# Altium PCB PCB4.PcbDoc (part 3 of 3)
Units mm, origin at the board's own origin, x right, y up, seen from the top; angles counter-clockwise.
Board outline 185.25 x 140.25 mm, 2 copper layers (Top Layer, Bottom Layer); 401 components, 60 nets, 1114 pads, 228 vias.
Unrouted connection lines stored in the file: 2.
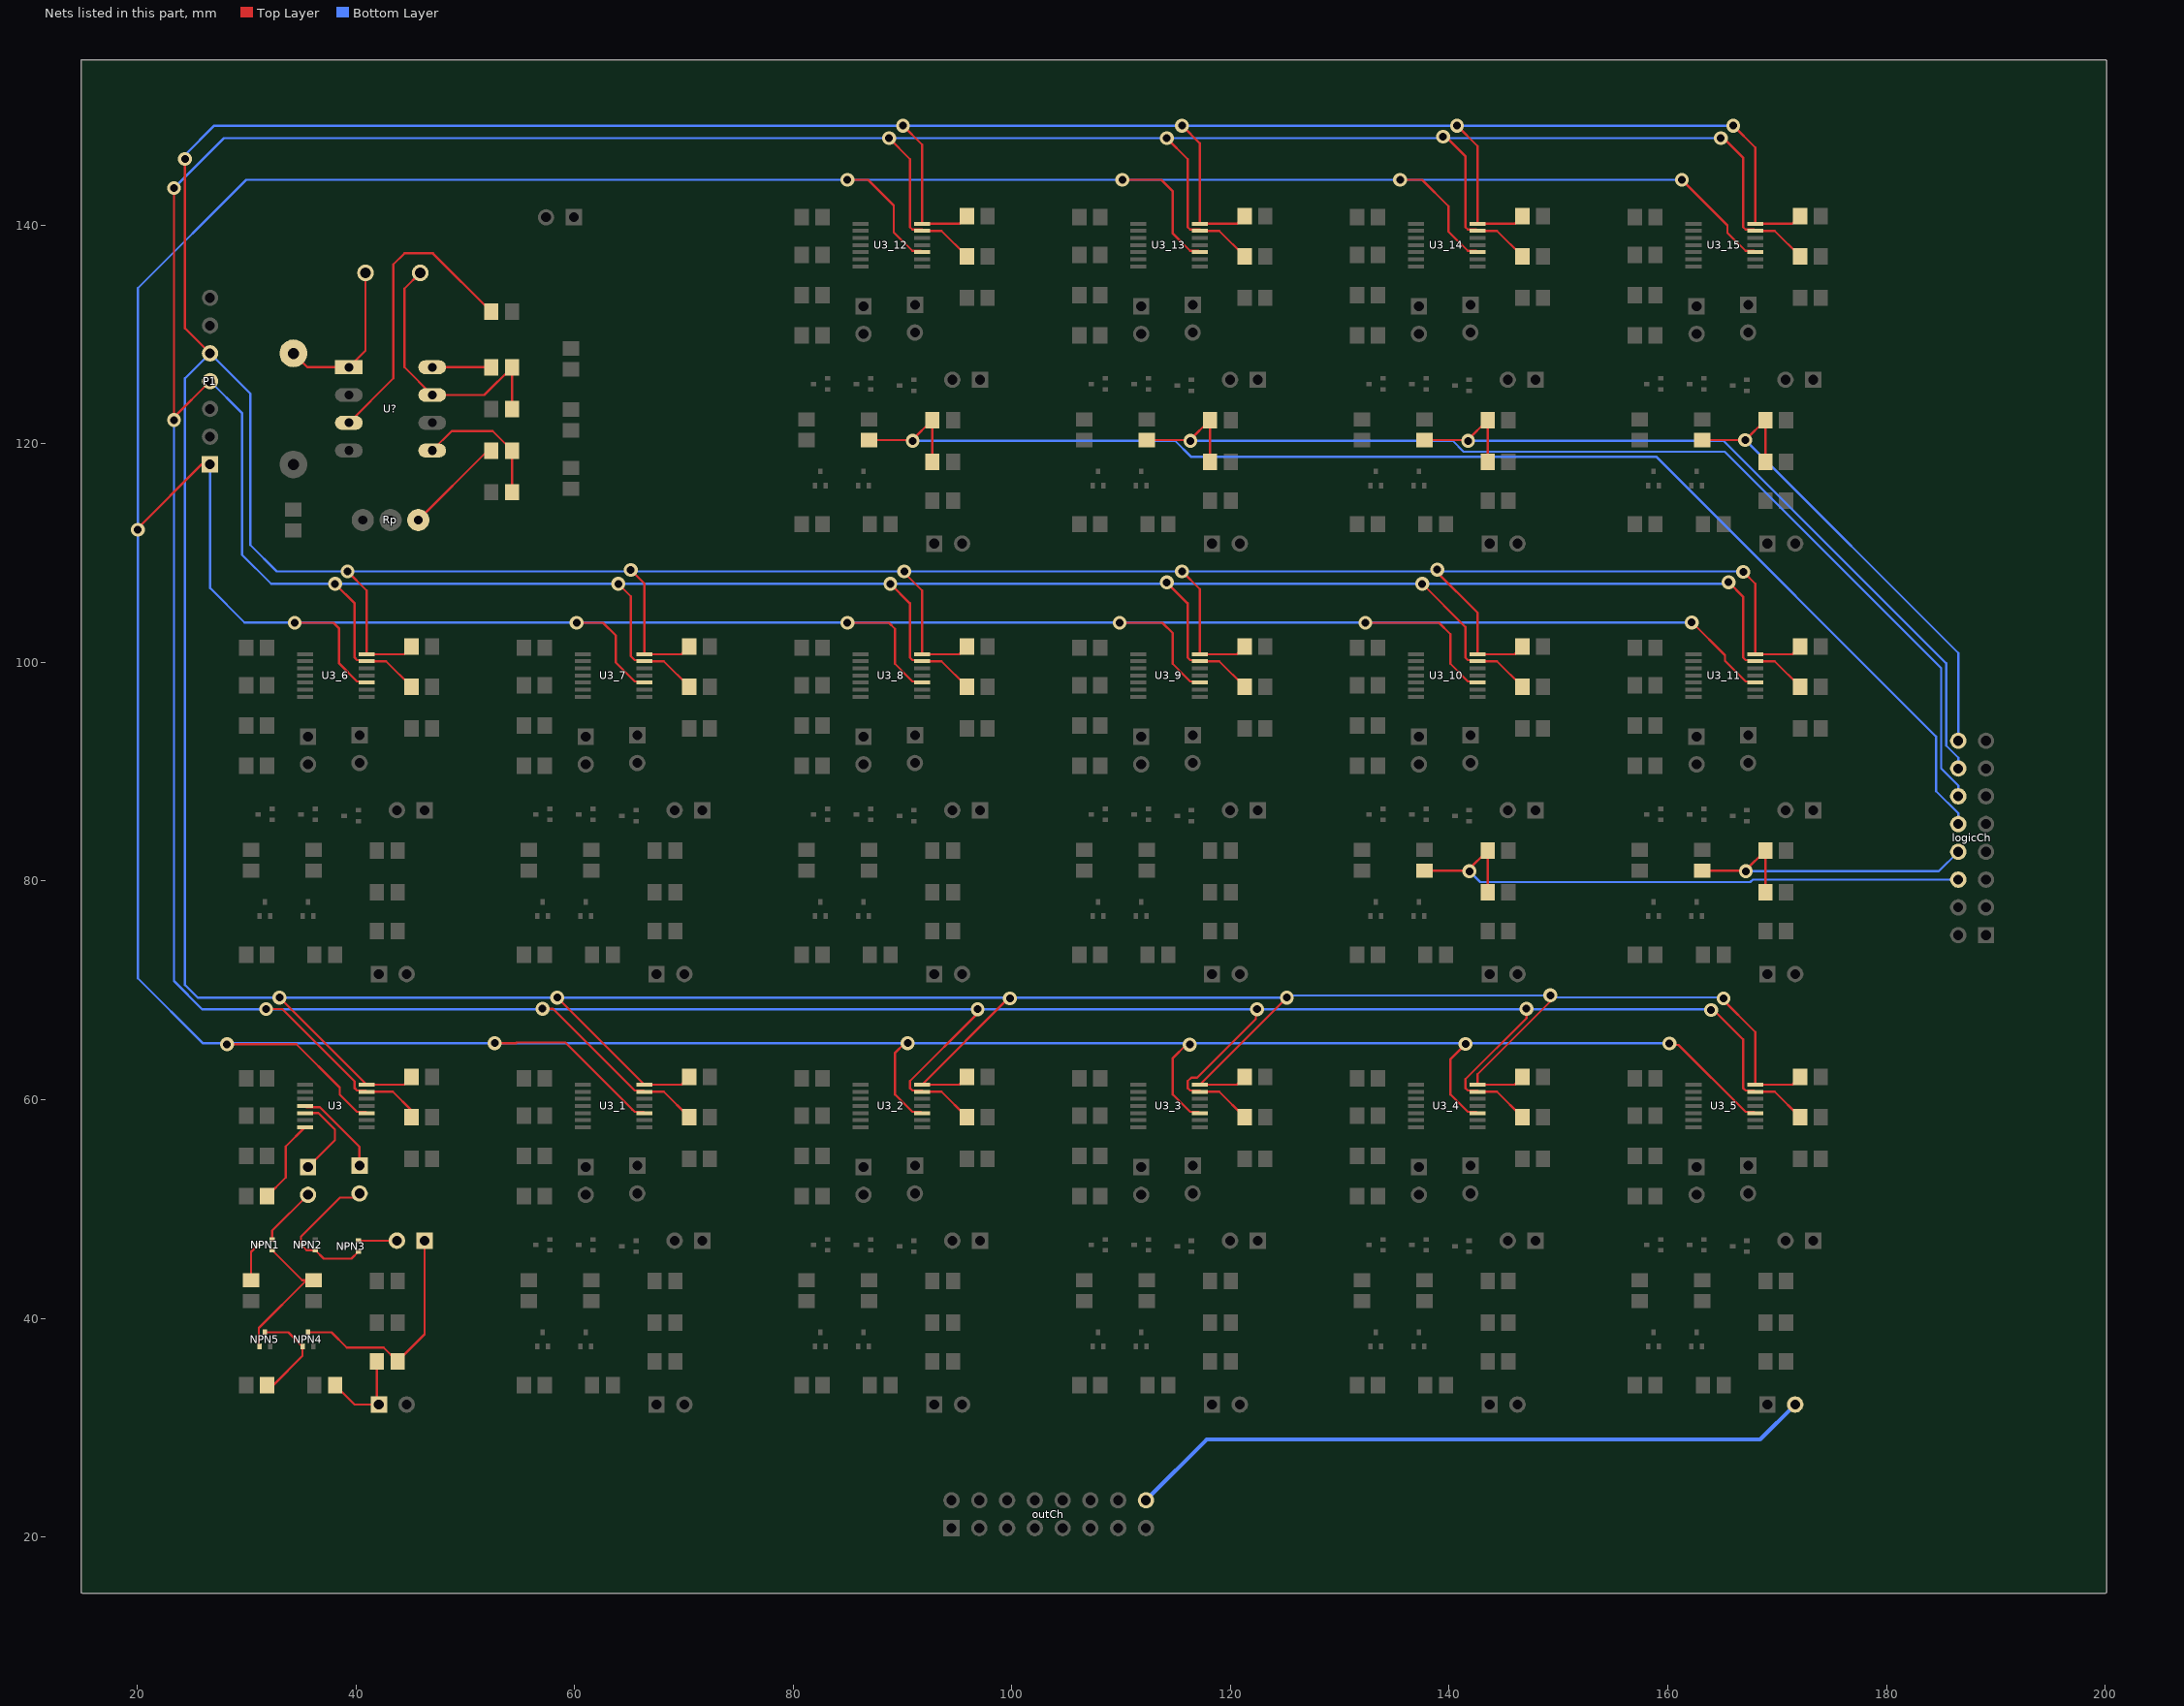
[diagram p3: the nets of this part, all layers, seen from the top]

## Via types
v1: diameter 1.27, hole 0.711, Top Layer to Bottom Layer, 228 vias

## Nets (pads, with @x,y where several pads share a name; then routed paths per layer and width w, separated by ;. In a path a pad name is that pad's centre, name@x,y a point inside that pad or via, vN(x,y) a via of type N, cw(c..) or ccw(c..) an arc to the next point about the centre after c; other vN are vias at no path point) (continued)
LOGICCH11: C1_10.1 C2_10.1 logicCh.11 R1_10.2 | length 55.6
  Top Layer w0.203: R1_10.2@137.739,80.962 141.681,80.962 C2_10.1@143.52,82.801 C1_10.1@143.52,78.991
  Bottom Layer w0.203: v1(141.859,80.899) 142.85,79.908 167.542,79.908 167.771,80.137 logicCh.11@186.563,80.137
LOGICCH12: C1_11.1 C2_11.1 logicCh.12 R1_11.2 | length 30.5
  Top Layer w0.203: R1_11.2@163.139,80.962 167.081,80.962 C2_11.1@168.92,82.801 C1_11.1@168.92,78.991
  Bottom Layer w0.203: v1(167.132,80.899) 184.785,80.899 logicCh.12@186.563,82.677
LOGICCH13: C1_12.1 C2_12.1 logicCh.13 R1_12.2 | length 124
  Top Layer w0.203: R1_12.2@86.939,120.332 90.881,120.332 C2_12.1@92.72,122.171 C1_12.1@92.72,118.361
  Bottom Layer w0.203: v1(90.932,120.269) 114.931,120.269 116.379,118.821 158.94,118.821 184.543,93.218 184.543,88.213 186.563,86.193 logicCh.13@186.563,85.217
LOGICCH14: C1_13.1 C2_13.1 logicCh.14 R1_13.2 | length 100
  Top Layer w0.203: R1_13.2@112.339,120.332 116.281,120.332 C2_13.1@118.12,122.171 C1_13.1@118.12,118.361
  Bottom Layer w0.203: v1(116.332,120.269) 140.331,120.269 141.322,119.278 165.202,119.278 185,99.48 185,90.296 186.563,88.733 logicCh.14@186.563,87.757
LOGICCH15: C1_14.1 C2_14.1 logicCh.15 R1_14.2 | length 72.6
  Top Layer w0.203: R1_14.2@137.739,120.332 141.681,120.332 C2_14.1@143.52,122.171 C1_14.1@143.52,118.361
  Bottom Layer w0.203: v1(141.732,120.269) 165.1,120.269 185.457,99.912 185.457,92.379 186.563,91.273 logicCh.15@186.563,90.297
LOGICCH16: C1_15.1 C2_15.1 logicCh.16 R1_15.2 | length 45.9
  Top Layer w0.203: R1_15.2@163.139,120.332 v1(167.081,120.332) C2_15.1@168.92,122.171 C1_15.1@168.92,118.361
  Bottom Layer w0.203: v1(167.081,120.332) 186.563,100.85 logicCh.16@186.563,92.837
MISO: P1.4 RD2.2 RD2_1.2 RD2_2.2 RD2_3.2 RD2_4.2 RD2_5.2 RD2_6.2 RD2_7.2 RD2_8.2 RD2_9.2 RD2_10.2 RD2_11.2 RD2_12.2 RD2_13.2 RD2_14.2 RD2_15.2 U3.13 U3_1.13 U3_2.13 U3_3.13 U3_4.13 U3_5.13 U3_6.13 U3_7.13 U3_8.13 U3_9.13 U3_10.13 U3_11.13 U3_12.13 U3_13.13 U3_14.13 U3_15.13 | length 759.6
  Top Layer w0.203: v1(23.368,122.174) v1@23.368,122.428 ; v1@23.368,143.002 v1@23.368,122.428 ; P1.4@26.67,125.73 v1@23.368,122.428 ; v1(31.801,68.301) 33.274,68.301 39.898,61.676 39.898,61.058 40.107,60.85 40.874,60.85 U3.13@40.99,60.733 43.381,60.733 45.095,59.02 RD2.2@45.095,58.417 ; v1(38.1,107.188) 39.898,105.39 39.898,100.428 40.107,100.22 40.99,100.22 U3_6.13@40.99,100.103 42.779,100.103 RD2_6.2@45.095,97.787 ; v1(57.074,68.326) 58.03,68.326 65.507,60.85 66.274,60.85 U3_1.13@66.39,60.733 68.179,60.733 RD2_1.2@70.495,58.417 ; v1(64.008,107.188) 65.151,106.045 65.151,100.575 65.507,100.22 66.274,100.22 U3_7.13@66.39,100.103 68.179,100.103 RD2_7.2@70.495,97.787 ; v1(88.773,147.955) 90.698,146.03 90.698,139.798 90.907,139.59 91.79,139.59 U3_12.13@91.79,139.473 93.579,139.473 RD2_12.2@95.895,137.157 ; v1(88.9,107.188) 90.678,105.41 90.678,100.448 90.907,100.22 91.674,100.22 U3_8.13@91.79,100.103 93.579,100.103 RD2_8.2@95.895,97.787 ; RD2_2.2@95.895,58.417 93.579,60.733 U3_2.13@91.79,60.733 91.79,60.85 90.907,60.85 90.698,61.058 90.698,61.708 96.876,67.886 v1(96.876,68.275) ; v1(114.173,107.315) 116.078,105.41 116.078,100.448 116.307,100.22 117.074,100.22 U3_9.13@117.19,100.103 118.979,100.103 RD2_9.2@121.295,97.787 ; v1(114.173,147.955) 116.098,146.03 116.098,139.798 116.307,139.59 117.19,139.59 U3_13.13@117.19,139.473 118.979,139.473 RD2_13.2@121.295,137.157 ; RD2_3.2@121.295,58.417 118.979,60.733 U3_3.13@117.19,60.733 117.19,60.85 116.307,60.85 116.098,61.058 116.098,61.708 116.42,62.03 116.948,62.03 122.309,67.39 122.309,68.156 v1(122.428,68.275) ; v1(137.541,107.188) 141.478,103.251 141.478,100.448 141.707,100.22 142.474,100.22 U3_10.13@142.59,100.103 144.379,100.103 RD2_10.2@146.695,97.787 ; v1@139.827,147.955 141.478,146.304 141.478,139.818 141.707,139.59 142.474,139.59 U3_14.13@142.59,139.473 144.379,139.473 RD2_14.2@146.695,137.157 ; RD2_4.2@146.695,58.417 144.379,60.733 U3_4.13@142.59,60.733 142.59,60.85 141.707,60.85 141.498,61.058 141.498,61.881 147.066,67.449 v1(147.066,68.326) ; v1(163.957,68.199) 164.084,68.326 166.878,65.532 166.878,61.078 167.107,60.85 167.874,60.85 U3_5.13@167.99,60.733 169.779,60.733 RD2_5.2@172.095,58.417 ; v1@165.227,147.828 166.878,146.177 166.878,139.818 167.107,139.59 167.874,139.59 U3_15.13@167.99,139.473 169.779,139.473 RD2_15.2@172.095,137.157 ; v1(165.557,107.34) 166.878,106.02 166.878,100.448 167.107,100.22 167.874,100.22 U3_11.13@167.99,100.103 169.779,100.103 RD2_11.2@172.095,97.787
  Bottom Layer w0.203: v1(23.368,122.174) 23.368,70.866 25.955,68.279 163.877,68.279 v1(163.957,68.199) ; v1(23.368,143.383) 27.94,147.955 v1(88.773,147.955) v1(114.173,147.955) v1(164.846,147.955) ; P1.4@26.67,125.73 29.591,122.809 29.591,109.855 32.258,107.188 v1(38.1,107.188) v1(64.008,107.188) v1(88.9,107.188) v1(137.541,107.188) 165.405,107.188 v1(165.557,107.34)
  other v1: 139.446,148.082
MOSI: P1.1 U3.10 U3_1.10 U3_2.10 U3_3.10 U3_4.10 U3_5.10 U3_6.10 U3_7.10 U3_8.10 U3_9.10 U3_10.10 U3_11.10 U3_12.10 U3_13.10 U3_14.10 U3_15.10 | length 685.7
  Top Layer w0.203: v1(20.066,112.141) 20.066,112.268 25.908,118.11 P1.1@26.67,118.11 ; v1(28.219,65.075) 34.558,65.075 38.527,61.106 38.527,60.48 40.107,58.9 40.874,58.9 U3.10@40.99,58.783 ; v1(34.417,103.632) 37.95,103.632 38.481,103.101 38.481,99.895 40.107,98.27 40.874,98.27 U3_6.10@40.99,98.153 ; v1(52.705,65.176) 54.639,65.176 54.703,65.24 59.17,65.24 65.298,59.111 65.298,59.108 65.507,58.9 66.274,58.9 U3_1.10@66.39,58.783 ; v1(60.198,103.632) 62.611,103.632 63.779,102.464 63.779,99.997 65.507,98.27 66.274,98.27 U3_7.10@66.39,98.153 ; v1(84.963,103.632) 88.75,103.632 89.306,103.075 89.306,99.87 90.907,98.27 91.674,98.27 U3_8.10@91.79,98.153 ; v1(84.963,144.145) 86.856,144.145 89.212,141.79 89.212,139.335 90.907,137.64 91.674,137.64 U3_12.10@91.79,137.523 ; v1(90.475,65.176) 90.195,65.176 89.327,64.308 89.327,60.48 90.907,58.9 91.674,58.9 U3_2.10@91.79,58.783 ; v1(109.855,103.632) 113.769,103.632 114.706,102.694 114.706,99.87 116.307,98.27 117.074,98.27 U3_9.10@117.19,98.153 ; v1(110.109,144.145) 113.665,144.145 114.727,143.083 114.727,139.22 116.307,137.64 117.074,137.64 U3_13.10@117.19,137.523 ; v1(116.281,65.049) 116.095,65.049 116.019,64.973 115.951,65.041 114.727,63.816 114.727,60.48 116.307,58.9 117.074,58.9 U3_3.10@117.19,58.783 ; v1(132.334,103.632) 139.065,103.632 140.106,102.591 140.106,99.87 141.707,98.27 142.474,98.27 U3_10.10@142.59,98.153 ; v1(135.509,144.145) 137.529,144.145 139.948,141.726 139.948,139.398 141.707,137.64 142.474,137.64 U3_14.10@142.59,137.523 ; v1(141.503,65.1) 140.127,63.723 140.127,60.48 141.707,58.9 142.474,58.9 U3_4.10@142.59,58.783 ; v1@160.274,65.024 160.982,65.024 167.107,58.9 167.874,58.9 U3_5.10@167.99,58.783 ; v1(161.29,144.145) 165.456,139.979 165.456,139.291 167.107,137.64 167.874,137.64 U3_15.10@167.99,137.523 ; v1(162.179,103.657) 162.23,103.657 165.233,100.654 165.233,100.143 167.107,98.27 167.874,98.27 U3_11.10@167.99,98.153
  Bottom Layer w0.203: P1.1@26.67,118.11 26.67,106.807 29.82,103.657 v1(162.179,103.657) ; v1(160.147,65.151) 160.122,65.176 v1(90.475,65.176) 26.06,65.176 26.035,65.151 20.066,71.12 v1(20.066,112.141) 20.066,134.239 29.972,144.145 v1(84.963,144.145) v1(110.109,144.145) v1(135.509,144.145) v1(161.29,144.145)
NetC3_1: C3.1 H1.1 NPN4.1 | length 21.4
  Top Layer w0.203: NPN4.1@35.631,38.732 37.79,38.732 39.187,37.335 42.553,37.335 43.82,36.068 C3.1@43.82,36.065 46.299,38.544 H1.1@46.299,47.114
NetC3_2: C3.2 H2.1 R4.2 | length 8.8
  Top Layer w0.203: R4.2@38.105,33.906 39.883,32.128 H2.1@42.108,32.128 41.92,32.316 C3.2@41.92,36.065
NetCD3_2: CD3.2 U3.7 | length 7.7
  Top Layer w0.203: CD3.2@31.882,51.178 33.599,52.895 33.599,55.731 U3.7@35.352,57.483
NetCo_2: 
NetCt_2: Ct.2 U?.3 | length 27.7
  Top Layer w0.203: U?.3@39.37,121.92 43.434,125.984 43.434,136.398 44.45,137.414 47.056,137.414 Ct.2@52.39,132.08
NetD1_2: D1.2 L.1 U?.1 | length 14.9
  Top Layer w0.203: D1.2@34.29,128.27 35.56,127 U?.1@39.37,127 40.894,128.524 L.1@40.894,135.636
NetH1_2: H1.2 NPN3.3 | length 3.5
  Top Layer w0.203: NPN3.3@40.241,47.114 H1.2@43.759,47.114
NetH2_2: H2_5.2 outCh.16 | length 63
  Bottom Layer w0.381: outCh.16@112.268,23.368 117.831,28.931 168.45,28.931 H2_5.2@171.648,32.128
NetHD1_1: HD1.1 U3.5 | length 7.8
  Top Layer w0.203: U3.5@35.352,58.783 36.594,58.783 38.1,57.277 38.1,56.314 HD1.1@35.631,53.845
NetHD2_1: HD2.1 U3.4 | length 8.7
  Top Layer w0.203: U3.4@35.352,59.433 35.468,59.317 36.707,59.317 40.342,55.682 40.342,53.73 HD2.1@40.203,53.591
NetL_2: L.2 Rs4.2 Rsc.2 U?.7 | length 25
  Top Layer w0.203: L.2@45.894,135.636 44.45,134.192 44.45,127 U?.7@46.99,124.46 51.753,124.46 54.29,126.997 Rsc.2@54.29,123.19
NetNPN1_1: NPN1.1 R2.1 | length 3.5
  Top Layer w0.203: R2.1@30.424,43.492 30.424,46.098 NPN1.1@31.059,46.733
NetNPN1_2: NPN1.2 NPN5.2 R1.1 | length 12.8
  Top Layer w0.203: NPN5.2@31.194,37.432 31.138,37.488 31.138,39.134 R1.1@35.496,43.492 ; NPN1.2@32.359,46.233 35.1,43.492 R1.1@35.496,43.492 ; R1.1@36.139,43.492 R1.1@35.496,43.492
NetNPN3_1: 
NetNPN4_2: NPN4.2 NPN5.1 R3.1 | length 9.2
  Top Layer w0.203: NPN5.1@31.694,38.732 33.831,38.732 NPN4.2@35.131,37.432 35.131,36.579 32.458,33.906 R3.1@31.882,33.906
NetRp_1: Rp.1 Rs2.1 | length 9.3
  Top Layer w0.203: Rp.1@45.72,113.03 52.07,119.38 Rs2.1@52.39,119.38
NetRs1_2: Rs1.2 Rs2.2 U?.5 | length 12.6
  Top Layer w0.203: U?.5@46.99,119.38 48.768,121.158 52.515,121.158 54.29,119.383 Rs2.2@54.29,119.38 Rs1.2@54.29,115.57
NetRs4_1: Rs4.1 U?.8 | length 5.4
  Top Layer w0.203: U?.8@46.99,127 Rs4.1@52.39,127
RDY: P1.5 RD1.1 RD1_1.1 RD1_2.1 RD1_3.1 RD1_4.1 RD1_5.1 RD1_6.1 RD1_7.1 RD1_8.1 RD1_9.1 RD1_10.1 RD1_11.1 RD1_12.1 RD1_13.1 RD1_14.1 RD1_15.1 U3.14 U3_1.14 U3_2.14 U3_3.14 U3_4.14 U3_5.14 U3_6.14 U3_7.14 U3_8.14 U3_9.14 U3_10.14 U3_11.14 U3_12.14 U3_13.14 U3_14.14 U3_15.14 | length 743.1
  Top Layer w0.203: v1(24.384,146.05) 24.384,130.556 P1.5@26.67,128.27 ; v1(33.02,69.342) 33.032,69.342 U3.14@40.99,61.383 44.399,61.383 RD1.1@45.095,62.079 ; v1(39.243,108.331) 40.99,106.584 U3_6.14@40.99,100.753 44.399,100.753 RD1_6.1@45.095,101.449 ; v1(58.42,69.342) 58.432,69.342 U3_1.14@66.39,61.383 69.799,61.383 RD1_1.1@70.495,62.079 ; v1(65.151,108.458) 66.39,107.219 U3_7.14@66.39,100.753 69.799,100.753 RD1_7.1@70.495,101.449 ; v1(90.043,149.098) 91.79,147.351 U3_12.14@91.79,140.123 95.199,140.123 RD1_12.1@95.895,140.819 ; v1@90.297,108.077 91.79,106.584 U3_8.14@91.79,100.753 95.199,100.753 RD1_8.1@95.895,101.449 ; RD1_2.1@95.895,62.079 95.199,61.383 U3_2.14@91.79,61.383 99.677,69.269 v1(99.822,69.269) ; v1(115.57,108.331) 117.19,106.711 U3_9.14@117.19,100.753 120.599,100.753 RD1_9.1@121.295,101.449 ; v1(115.57,149.098) 117.19,147.478 U3_13.14@117.19,140.123 120.599,140.123 RD1_13.1@121.295,140.819 ; RD1_3.1@121.295,62.079 120.599,61.383 U3_3.14@117.19,61.383 v1(125.149,69.342) ; v1@138.862,108.28 142.59,104.552 U3_10.14@142.59,100.753 145.999,100.753 RD1_10.1@146.695,101.449 ; v1(140.716,149.098) 142.59,147.224 U3_14.14@142.59,140.123 145.999,140.123 RD1_14.1@146.695,140.819 ; RD1_4.1@146.695,62.079 145.999,61.383 U3_4.14@142.59,61.383 142.59,62.326 149.25,68.986 v1(149.25,69.545) ; v1@164.973,69.215 167.99,66.198 U3_5.14@167.99,61.383 171.399,61.383 RD1_5.1@172.095,62.079 ; v1(165.989,149.098) 167.99,147.097 U3_15.14@167.99,140.123 171.399,140.123 RD1_15.1@172.095,140.819 ; v1(166.903,108.28) 167.99,107.193 U3_11.14@167.99,100.753 171.399,100.753 RD1_11.1@172.095,101.449
  Bottom Layer w0.203: v1(24.384,146.05) 24.384,146.431 27.051,149.098 v1(115.57,149.098) v1(140.716,149.098) v1(165.989,149.098) ; v1(99.822,69.269) v1@99.749,69.342 ; v1@165.354,68.834 164.821,69.367 149.428,69.367 v1(149.25,69.545) 125.353,69.545 v1(125.149,69.342) v1@99.749,69.342 ; v1(166.903,108.28) 166.853,108.331 v1(115.57,108.331) v1(90.17,108.331) v1(39.243,108.331) 32.766,108.331 30.353,110.744 30.353,124.587 P1.5@26.67,128.27 24.384,125.984 24.384,70.497 25.539,69.342 v1(58.42,69.342) v1@99.749,69.342
  other v1: 165.1,69.266 138.913,108.483
RIN: HD1.2 NPN1.3 | length 5.4
  Top Layer w0.203: NPN1.3@32.359,47.233 32.359,48.033 HD1.2@35.631,51.305
ROUT: HD2.2 NPN2.1 NPN2.2 NPN3.2 | length 13.5
  Top Layer w0.203: HD2.2@40.203,51.051 38.554,51.051 34.996,47.493 NPN2.1@34.996,46.733 35.496,46.233 NPN2.2@36.296,46.233 37.066,45.463 39.59,45.463 NPN3.2@40.233,46.106
pads on no net: C3_1.1 C3_1.2 C3_2.1 C3_2.2 C3_3.1 C3_3.2 C3_4.1 C3_4.2 C3_5.1 C3_5.2 C3_6.1 C3_6.2 C3_7.1 C3_7.2 C3_8.1 C3_8.2 C3_9.1 C3_9.2 C3_10.1 C3_10.2 C3_11.1 C3_11.2 C3_12.1 C3_12.2 C3_13.1 C3_13.2 C3_14.1 C3_14.2 C3_15.1 C3_15.2 CD3_1.2 CD3_2.2 CD3_3.2 CD3_4.2 CD3_5.2 CD3_6.2 CD3_7.2 CD3_8.2 CD3_9.2 CD3_10.2 CD3_11.2 CD3_12.2 CD3_13.2 CD3_14.2 CD3_15.2 H1_1.1 H1_1.2 H1_2.1 H1_2.2 H1_3.1 H1_3.2 H1_4.1 H1_4.2 H1_5.1 H1_5.2 H1_6.1 H1_6.2 H1_7.1 H1_7.2 H1_8.1 H1_8.2 H1_9.1 H1_9.2 H1_10.1 H1_10.2 H1_11.1 H1_11.2 H1_12.1 H1_12.2 H1_13.1 H1_13.2 H1_14.1 H1_14.2 H1_15.1 H1_15.2 H2_1.1 H2_2.1 H2_3.1 H2_4.1 H2_5.1 H2_6.1 H2_7.1 H2_8.1 H2_9.1 H2_10.1 H2_11.1 H2_12.1 H2_13.1 H2_14.1 H2_15.1 HD1_1.1 HD1_1.2 HD1_2.1 HD1_2.2 HD1_3.1 HD1_3.2 HD1_4.1 HD1_4.2 HD1_5.1 HD1_5.2 HD1_6.1 HD1_6.2 HD1_7.1 HD1_7.2 HD1_8.1 HD1_8.2 HD1_9.1 HD1_9.2 HD1_10.1 HD1_10.2 HD1_11.1 HD1_11.2 HD1_12.1 HD1_12.2 HD1_13.1 HD1_13.2 HD1_14.1 HD1_14.2 HD1_15.1 HD1_15.2 HD2_1.1 HD2_1.2 HD2_2.1 HD2_2.2 HD2_3.1 HD2_3.2 HD2_4.1 HD2_4.2 HD2_5.1 HD2_5.2 HD2_6.1 HD2_6.2 HD2_7.1 HD2_7.2 HD2_8.1 HD2_8.2 HD2_9.1 HD2_9.2 HD2_10.1 HD2_10.2 HD2_11.1 HD2_11.2 HD2_12.1 HD2_12.2 HD2_13.1 HD2_13.2 HD2_14.1 HD2_14.2 HD2_15.1 HD2_15.2 NPN1_1.1 NPN1_1.2 NPN1_1.3 NPN1_2.1 NPN1_2.2 NPN1_2.3 NPN1_3.1 NPN1_3.2 NPN1_3.3 NPN1_4.1 NPN1_4.2 NPN1_4.3 NPN1_5.1 NPN1_5.2 NPN1_5.3 NPN1_6.1 NPN1_6.2 NPN1_6.3 NPN1_7.1 NPN1_7.2 NPN1_7.3 NPN1_8.1 NPN1_8.2 NPN1_8.3 NPN1_9.1 NPN1_9.2 NPN1_9.3 NPN1_10.1 NPN1_10.2 NPN1_10.3 NPN1_11.1 NPN1_11.2 NPN1_11.3 NPN1_12.1 NPN1_12.2 NPN1_12.3 NPN1_13.1 NPN1_13.2 NPN1_13.3 NPN1_14.1 NPN1_14.2 NPN1_14.3 NPN1_15.1 NPN1_15.2 NPN1_15.3 NPN2_1.1 NPN2_1.2 NPN2_2.1 NPN2_2.2 NPN2_3.1 NPN2_3.2 NPN2_4.1 NPN2_4.2 NPN2_5.1 NPN2_5.2 NPN2_6.1 NPN2_6.2 NPN2_7.1 NPN2_7.2 NPN2_8.1 NPN2_8.2 NPN2_9.1 NPN2_9.2 NPN2_10.1 NPN2_10.2 NPN2_11.1 NPN2_11.2 NPN2_12.1 NPN2_12.2 NPN2_13.1 NPN2_13.2 NPN2_14.1 NPN2_14.2 NPN2_15.1 NPN2_15.2 NPN3_1.2 NPN3_1.3 NPN3_2.2 NPN3_2.3 NPN3_3.2 NPN3_3.3 NPN3_4.2 NPN3_4.3 NPN3_5.2 NPN3_5.3 NPN3_6.2 NPN3_6.3 NPN3_7.2 NPN3_7.3 NPN3_8.2 NPN3_8.3 NPN3_9.2 NPN3_9.3 NPN3_10.2 NPN3_10.3 NPN3_11.2 NPN3_11.3 NPN3_12.2 NPN3_12.3 NPN3_13.2 NPN3_13.3 NPN3_14.2 NPN3_14.3 NPN3_15.2 NPN3_15.3 NPN4_1.1 NPN4_1.2 NPN4_2.1 NPN4_2.2 NPN4_3.1 NPN4_3.2 NPN4_4.1 NPN4_4.2 NPN4_5.1 NPN4_5.2 NPN4_6.1 NPN4_6.2 NPN4_7.1 NPN4_7.2 NPN4_8.1 NPN4_8.2 NPN4_9.1 NPN4_9.2 NPN4_10.1 NPN4_10.2 NPN4_11.1 NPN4_11.2 NPN4_12.1 NPN4_12.2 NPN4_13.1 NPN4_13.2 NPN4_14.1 NPN4_14.2 NPN4_15.1 NPN4_15.2 NPN5_1.1 NPN5_1.2 NPN5_2.1 NPN5_2.2 NPN5_3.1 NPN5_3.2 NPN5_4.1 NPN5_4.2 NPN5_5.1 NPN5_5.2 NPN5_6.1 NPN5_6.2 NPN5_7.1 NPN5_7.2 NPN5_8.1 NPN5_8.2 NPN5_9.1 NPN5_9.2 NPN5_10.1 NPN5_10.2 NPN5_11.1 NPN5_11.2 NPN5_12.1 NPN5_12.2 NPN5_13.1 NPN5_13.2 NPN5_14.1 NPN5_14.2 NPN5_15.1 NPN5_15.2 R1_1.1 R1_2.1 R1_3.1 R1_4.1 R1_5.1 R1_6.1 R1_7.1 R1_8.1 R1_9.1 R1_10.1 R1_11.1 R1_12.1 R1_13.1 R1_14.1 R1_15.1 R2_1.1 R2_2.1 R2_3.1 R2_4.1 R2_5.1 R2_6.1 R2_7.1 R2_8.1 R2_9.1 R2_10.1 R2_11.1 R2_12.1 R2_13.1 R2_14.1 R2_15.1 R3_1.1 R3_2.1 R3_3.1 R3_4.1 R3_5.1 R3_6.1 R3_7.1 R3_8.1 R3_9.1 R3_10.1 R3_11.1 R3_12.1 R3_13.1 R3_14.1 R3_15.1 R4_1.2 R4_2.2 R4_3.2 R4_4.2 R4_5.2 R4_6.2 R4_7.2 R4_8.2 R4_9.2 R4_10.2 R4_11.2 R4_12.2 R4_13.2 R4_14.2 R4_15.2 Rp.3 U3.3 U3_1.3 U3_1.4 U3_1.5 U3_1.7 U3_2.3 U3_2.4 U3_2.5 U3_2.7 U3_3.3 U3_3.4 U3_3.5 U3_3.7 U3_4.3 U3_4.4 U3_4.5 U3_4.7 U3_5.3 U3_5.4 U3_5.5 U3_5.7 U3_6.3 U3_6.4 U3_6.5 U3_6.7 U3_7.3 U3_7.4 U3_7.5 U3_7.7 U3_8.3 U3_8.4 U3_8.5 U3_8.7 U3_9.3 U3_9.4 U3_9.5 U3_9.7 U3_10.3 U3_10.4 U3_10.5 U3_10.7 U3_11.3 U3_11.4 U3_11.5 U3_11.7 U3_12.3 U3_12.4 U3_12.5 U3_12.7 U3_13.3 U3_13.4 U3_13.5 U3_13.7 U3_14.3 U3_14.4 U3_14.5 U3_14.7 U3_15.3 U3_15.4 U3_15.5 U3_15.7
copper on no net: | length 1533.1
  Top Layer w0.203: 30.424,82.862 30.424,85.468 31.059,86.103 ; 31.194,76.802 31.138,76.858 31.138,78.504 35.496,82.862 ; 31.694,78.102 33.886,78.102 35.159,76.83 31.882,73.553 31.882,73.276 ; 31.882,90.548 33.599,92.265 33.599,95.101 35.352,96.853 ; 32.359,85.603 35.1,82.862 35.496,82.862 ; 32.359,86.603 32.359,87.403 35.631,90.675 ; 35.352,98.153 36.543,98.153 38.1,96.596 38.1,95.684 35.631,93.215 ; 35.352,98.803 35.468,98.687 36.695,98.687 40.342,95.04 40.342,93.1 40.203,92.961 ; 35.631,78.102 37.277,78.102 38.674,76.705 42.553,76.705 43.82,75.438 43.82,75.435 46.299,77.914 46.299,86.484 ; 36.139,82.862 35.496,82.862 ; 38.105,73.276 39.883,71.498 42.108,71.498 41.92,71.686 41.92,75.435 ; 40.203,90.421 38.834,90.421 34.996,86.583 34.996,86.103 35.496,85.603 36.296,85.603 37.066,84.833 39.59,84.833 40.233,85.476 ; 40.241,86.484 43.759,86.484 ; 55.824,43.492 55.824,46.098 56.459,46.733 ; 55.824,82.862 55.824,85.468 56.459,86.103 ; 56.594,37.432 56.538,37.488 56.538,39.134 60.896,43.492 ; 56.594,76.802 56.538,76.858 56.538,78.504 60.896,82.862 ; 57.094,38.732 59.231,38.732 60.67,37.294 57.282,33.906 ; 57.094,78.102 59.231,78.102 60.531,76.802 60.531,76 57.808,73.276 57.282,73.276 ; 57.282,51.178 58.999,52.895 58.999,55.731 60.752,57.483 ; 57.282,90.548 58.999,92.265 58.999,95.101 60.752,96.853 ; 57.759,46.233 60.5,43.492 60.896,43.492 ; 57.759,47.233 57.759,48.033 61.031,51.305 ; 57.759,85.603 60.5,82.862 60.896,82.862 ; 57.759,86.603 57.759,87.403 61.031,90.675 ; 60.752,58.783 61.994,58.783 63.5,57.277 63.5,56.314 61.031,53.845 ; 60.752,59.433 60.868,59.317 62.222,59.317 65.742,55.797 65.742,53.73 65.603,53.591 ; 60.752,98.153 61.918,98.153 63.5,96.571 63.5,95.684 61.031,93.215 ; 60.752,98.803 60.868,98.687 61.994,98.687 65.742,94.939 65.742,93.1 65.603,92.961 ; 61.031,38.732 63.19,38.732 64.587,37.335 67.953,37.335 69.22,36.068 69.22,36.065 71.699,38.544 71.699,47.114 ; 61.031,78.102 63.19,78.102 64.587,76.705 67.953,76.705 69.22,75.438 69.22,75.435 71.699,77.914 71.699,86.484 ; 61.539,43.492 60.896,43.492 ; 61.539,82.862 60.896,82.862 ; 63.505,33.906 65.283,32.128 67.508,32.128 67.32,32.316 67.32,36.065 ; 63.505,73.276 65.283,71.498 67.508,71.498 67.32,71.686 67.32,75.435 ; 65.603,51.051 63.929,51.051 60.396,47.518 60.396,46.733 60.896,46.233 61.696,46.233 62.466,45.463 64.99,45.463 65.633,46.106 ; 65.603,90.421 64.183,90.421 60.396,86.634 60.396,86.103 60.896,85.603 61.696,85.603 62.466,84.833 64.99,84.833 65.633,85.476 ; 65.641,47.114 69.159,47.114 ; 65.641,86.484 69.159,86.484 ; 76.906,104.518 76.906,104.772 ; 81.224,43.492 81.224,46.098 81.859,46.733 ; 81.224,82.862 81.224,85.468 81.859,86.103 ; 81.224,122.232 81.224,124.838 81.859,125.473 ; 81.994,37.432 81.938,37.488 81.938,39.134 86.296,43.492 ; 81.994,76.802 81.938,76.858 81.938,78.504 86.296,82.862 ; 81.994,116.172 81.938,116.228 81.938,117.874 86.296,122.232 ; 82.494,38.732 84.631,38.732 86.07,37.294 82.682,33.906 ; 82.494,78.102 84.631,78.102 85.931,76.802 85.931,76.177 83.03,73.276 82.682,73.276 ; 82.494,117.472 84.631,117.472 86.231,115.872 86.017,115.659 83.004,112.646 82.682,112.646 ; 82.682,51.178 84.399,52.895 84.399,55.731 86.152,57.483 ; 82.682,90.548 84.399,92.265 84.399,95.101 86.152,96.853 ; 82.682,129.918 84.399,131.635 84.399,134.471 86.152,136.223 ; 83.159,46.233 85.9,43.492 86.296,43.492 ; 83.159,47.233 83.159,48.033 86.431,51.305 ; 83.159,85.603 85.9,82.862 86.296,82.862 ; 83.159,86.603 83.159,87.403 86.431,90.675 ; 83.159,124.973 85.9,122.232 86.296,122.232 ; 83.159,125.973 83.159,126.773 86.431,130.045 ; 86.152,58.783 87.394,58.783 88.9,57.277 88.9,56.314 86.431,53.845 ; 86.152,59.433 86.268,59.317 87.622,59.317 91.142,55.797 91.142,53.73 91.003,53.591 ; 86.152,98.153 87.267,98.153 88.9,96.52 88.9,95.684 86.431,93.215 ; 86.152,98.803 86.268,98.687 87.47,98.687 91.142,95.015 91.142,93.1 91.003,92.961 ; 86.152,137.523 87.318,137.523 88.9,135.941 88.9,135.054 86.431,132.585 ; 86.152,138.173 86.268,138.057 87.445,138.057 91.142,134.36 91.142,132.47 91.003,132.331 ; 86.431,38.732 88.59,38.732 89.987,37.335 93.353,37.335 94.62,36.068 94.62,36.065 97.099,38.544 97.099,47.114 ; 86.431,78.102 88.59,78.102 89.987,76.705 93.353,76.705 94.62,75.438 94.62,75.435 97.099,77.914 97.099,86.484 ; 86.431,117.472 88.59,117.472 89.987,116.075 93.353,116.075 94.62,114.808 94.62,114.805 97.099,117.284 97.099,125.854 ; 86.939,43.492 86.296,43.492 ; 86.939,82.862 86.296,82.862 ; 86.939,122.232 86.296,122.232 ; 88.905,33.906 90.683,32.128 92.908,32.128 92.72,32.316 92.72,36.065 ; 88.905,73.276 90.683,71.498 92.908,71.498 92.72,71.686 92.72,75.435 ; 88.905,112.646 90.683,110.868 92.908,110.868 92.72,111.056 92.72,114.805 ; 91.003,51.051 89.1,51.051 85.796,47.747 85.796,46.733 86.296,46.233 87.096,46.233 87.736,45.593 90.52,45.593 91.033,46.106 ; 91.003,90.421 89.659,90.421 85.796,86.558 85.796,86.103 86.296,85.603 87.096,85.603 87.866,84.833 90.39,84.833 91.033,85.476 ; 91.003,129.791 89.405,129.791 85.796,126.182 85.796,125.473 86.296,124.973 87.096,124.973 87.866,124.203 90.39,124.203 91.033,124.846 ; 91.041,47.114 94.559,47.114 ; 91.041,86.484 94.559,86.484 ; 91.041,125.854 94.559,125.854 ; 102.306,65.148 102.306,65.402 ; 102.306,104.518 102.306,104.772 ; 102.306,143.888 102.306,144.142 ; 106.624,43.492 106.624,46.098 107.259,46.733 ; 106.624,82.862 106.624,85.468 107.259,86.103 ; 106.624,122.232 106.624,124.838 107.259,125.473 ; 107.394,37.432 107.338,37.488 107.338,39.134 111.696,43.492 ; 107.394,76.802 107.338,76.858 107.338,78.504 111.696,82.862 ; 107.394,116.172 107.338,116.228 107.338,117.874 111.696,122.232 ; 107.894,38.732 110.031,38.732 111.331,37.432 111.331,36.642 108.595,33.906 108.082,33.906 ; 107.894,78.102 110.34,78.102 111.331,77.112 111.331,76.525 108.082,73.276 ; 107.894,117.472 110.031,117.472 111.47,116.034 108.082,112.646 ; 108.082,51.178 109.799,52.895 109.799,55.731 111.552,57.483 ; 108.082,90.548 109.799,92.265 109.799,95.101 111.552,96.853 ; 108.082,129.918 109.799,131.635 109.799,134.471 111.552,136.223 ; 108.559,46.233 111.3,43.492 111.696,43.492 ; 108.559,47.233 108.559,48.033 111.831,51.305 ; 108.559,85.603 111.3,82.862 111.696,82.862 ; 108.559,86.603 108.559,87.403 111.831,90.675 ; 108.559,124.973 111.3,122.232 111.696,122.232 ; 108.559,125.973 108.559,126.773 111.831,130.045 ; 111.552,58.783 112.921,58.783 114.3,57.404 114.3,56.314 111.831,53.845 ; 111.552,59.433 111.668,59.317 113.022,59.317 116.542,55.797 116.542,53.73 116.403,53.591 ; 111.552,98.153 112.667,98.153 114.3,96.52 114.3,95.684 111.831,93.215 ; 111.552,98.803 111.668,98.687 112.819,98.687 116.542,94.964 116.542,93.1 116.403,92.961 ; 111.552,137.523 112.743,137.523 114.3,135.966 114.3,135.054 111.831,132.585 ; 111.552,138.173 111.668,138.057 112.946,138.057 116.542,134.461 116.542,132.47 116.403,132.331 ; 111.831,38.732 113.99,38.732 115.387,37.335 118.753,37.335 120.02,36.068 120.02,36.065 122.499,38.544 122.499,47.114 ; 111.831,78.102 113.99,78.102 115.387,76.705 118.753,76.705 120.02,75.438 120.02,75.435 122.499,77.914 122.499,86.484 ; 111.831,117.472 113.99,117.472 115.387,116.075 118.753,116.075 120.02,114.808 120.02,114.805 122.499,117.284 122.499,125.854 ; 112.339,43.492 111.696,43.492 ; 112.339,82.862 111.696,82.862 ; 112.339,122.232 111.696,122.232 ; 114.305,33.906 116.083,32.128 118.308,32.128 118.12,32.316 118.12,36.065 ; 114.305,73.276 116.083,71.498 118.308,71.498 118.12,71.686 118.12,75.435 ; 114.305,112.646 116.083,110.868 118.308,110.868 118.12,111.056 118.12,114.805 ; 116.403,51.051 114.856,51.051 111.196,47.391 111.196,46.733 111.696,46.233 112.496,46.233 112.882,45.847 116.174,45.847 116.433,46.106 ; 116.403,90.421 114.881,90.421 111.196,86.736 111.196,86.103 111.696,85.603 112.496,85.603 113.266,84.833 115.79,84.833 116.433,85.476 ; 116.403,129.791 115.356,129.791 111.196,125.631 111.196,125.473 111.696,124.973 112.496,124.973 113.266,124.203 115.79,124.203 116.433,124.846 ; 116.441,47.114 119.959,47.114 ; 116.441,86.484 119.959,86.484 ; 116.441,125.854 119.959,125.854 ; 127.706,104.518 127.706,104.772 ; 132.024,43.492 132.024,46.098 132.659,46.733 ; 132.024,82.862 132.024,85.468 132.659,86.103 ; 132.024,122.232 132.024,124.838 132.659,125.473 ; 132.794,37.432 132.738,37.488 132.738,39.134 137.096,43.492 ; 132.794,76.802 132.738,76.858 132.738,78.504 137.096,82.862 ; 132.794,116.172 132.738,116.228 132.738,117.874 137.096,122.232 ; 133.294,38.732 135.431,38.732 136.87,37.294 133.482,33.906 ; 133.294,78.102 135.664,78.102 136.848,76.919 133.482,73.553 133.482,73.276 ; 133.294,117.472 135.431,117.472 136.802,116.101 133.604,112.903 133.604,112.522 ; 133.482,51.178 135.199,52.895 135.199,55.731 136.952,57.483 ; 133.482,90.548 135.199,92.265 135.199,95.101 136.952,96.853 ; 133.482,129.918 135.199,131.635 135.199,134.471 136.952,136.223 ; 133.959,46.233 136.7,43.492 137.096,43.492 ; 133.959,47.233 133.959,48.033 137.231,51.305 ; 133.959,85.603 136.7,82.862 137.096,82.862 ; 133.959,86.603 133.959,87.403 137.231,90.675 ; 133.959,124.973 136.7,122.232 137.096,122.232 ; 133.959,125.973 133.959,126.773 137.231,130.045 ; 136.952,58.783 138.067,58.783 139.7,57.15 139.7,56.314 137.231,53.845 ; 136.952,59.433 137.068,59.317 138.168,59.317 141.942,55.543 141.942,53.73 141.803,53.591 ; 136.952,98.153 138.092,98.153 139.7,96.545 139.7,95.684 137.231,93.215 ; 136.952,98.803 137.068,98.687 138.27,98.687 141.942,95.015 141.942,93.1 141.803,92.961 ; 136.952,137.523 138.041,137.523 139.7,135.865 139.7,135.054 137.231,132.585 ; 136.952,138.173 137.068,138.057 138.295,138.057 141.942,134.41 141.942,132.47 141.803,132.331 ; 137.231,38.732 139.39,38.732 140.787,37.335 144.153,37.335 145.42,36.068 145.42,36.065 147.899,38.544 147.899,47.114 ; 137.231,78.102 139.39,78.102 140.787,76.705 144.153,76.705 145.42,75.438 145.42,75.435 147.899,77.914 147.899,86.484 ; 137.231,117.472 139.39,117.472 140.787,116.075 144.153,116.075 145.42,114.808 145.42,114.805 147.899,117.284 147.899,125.854 ; 137.739,43.492 137.096,43.492 ; 137.739,82.862 137.096,82.862 ; 137.739,122.232 137.096,122.232 ; 139.705,33.906 141.483,32.128 143.708,32.128 143.52,32.316 143.52,36.065 ; 139.705,73.276 141.483,71.498 143.708,71.498 143.52,71.686 143.52,75.435 ; 139.705,112.646 141.483,110.868 143.708,110.868 143.52,111.056 143.52,114.805 ; 141.803,51.051 140.027,51.051 136.596,47.62 136.596,46.733 137.096,46.233 137.896,46.233 138.666,45.463 141.19,45.463 141.833,46.106 ; 141.803,90.421 139.951,90.421 136.596,87.066 136.596,86.103 137.096,85.603 137.896,85.603 138.666,84.833 141.19,84.833 141.833,85.476 ; 141.803,129.791 140.205,129.791 136.596,126.182 136.596,125.473 137.096,124.973 137.896,124.973 138.666,124.203 141.19,124.203 141.833,124.846 ; 141.841,47.114 145.359,47.114 ; 141.841,86.484 145.359,86.484 ; 141.841,125.854 145.359,125.854 ; 153.106,104.518 153.106,104.772 ; 157.424,43.492 157.424,46.098 158.059,46.733 ; 157.424,82.862 157.424,85.468 158.059,86.103 ; 157.424,122.232 157.424,124.838 158.059,125.473 ; 158.194,37.432 158.138,37.488 158.138,39.134 162.496,43.492 ; 158.194,76.802 158.138,76.858 158.138,78.504 162.496,82.862 ; 158.194,116.172 158.138,116.228 158.138,117.874 162.496,122.232 ; 158.694,38.732 160.831,38.732 162.131,37.432 162.131,36.096 159.941,33.906 158.882,33.906 ; 158.694,78.102 161.293,78.102 162.131,77.264 162.131,76.525 158.882,73.276 ; 158.694,117.472 160.831,117.472 162.131,116.172 162.131,115.116 159.662,112.646 158.882,112.646 ; 158.882,51.178 160.599,52.895 160.599,55.731 162.352,57.483 ; 158.882,90.548 160.599,92.265 160.599,95.101 162.352,96.853 ; 158.882,129.918 160.599,131.635 160.599,134.471 162.352,136.223 ; 159.359,46.233 162.1,43.492 162.496,43.492 ; 159.359,47.233 159.359,48.033 162.631,51.305 ; 159.359,85.603 162.1,82.862 162.496,82.862 ; 159.359,86.603 159.359,87.403 162.631,90.675 ; 159.359,124.973 162.1,122.232 162.496,122.232 ; 159.359,125.973 159.359,126.773 162.631,130.045 ; 162.352,58.783 163.467,58.783 165.1,57.15 165.1,56.314 162.631,53.845 ; 162.352,59.433 162.468,59.317 163.695,59.317 167.342,55.67 167.342,53.73 167.203,53.591 ; 162.352,98.153 163.492,98.153 165.1,96.545 165.1,95.684 162.631,93.215 ; 162.352,98.803 162.468,98.687 163.721,98.687 167.342,95.066 167.342,93.1 167.203,92.961 ; 162.352,137.523 163.543,137.523 165.1,135.966 165.1,135.054 162.631,132.585 ; 162.352,138.173 162.468,138.057 163.746,138.057 167.342,134.461 167.342,132.47 167.203,132.331 ; 162.631,38.732 164.79,38.732 166.187,37.335 169.553,37.335 170.82,36.068 170.82,36.065 173.299,38.544 173.299,47.114 ; 162.631,78.102 164.79,78.102 166.187,76.705 169.553,76.705 170.82,75.438 170.82,75.435 173.299,77.914 173.299,86.484 ; 162.631,117.472 164.79,117.472 166.187,116.075 169.553,116.075 170.82,114.808 170.82,114.805 173.299,117.284 173.299,125.854 ; 163.139,43.492 162.496,43.492 ; 163.139,82.862 162.496,82.862 ; 163.139,122.232 162.496,122.232 ; 165.105,33.906 166.883,32.128 169.108,32.128 168.92,32.316 168.92,36.065 ; 165.105,73.276 166.883,71.498 169.108,71.498 168.92,71.686 168.92,75.435 ; 165.105,112.646 166.883,110.868 169.108,110.868 168.92,111.056 168.92,114.805 ; 167.203,51.051 164.873,51.051 161.996,48.174 161.996,46.733 162.496,46.233 163.296,46.233 164.066,45.463 166.59,45.463 167.233,46.106 ; 167.203,90.421 166.156,90.421 161.996,86.261 161.996,86.103 162.496,85.603 163.296,85.603 164.066,84.833 166.59,84.833 167.233,85.476 ; 167.203,129.791 165.148,129.791 161.996,126.639 161.996,125.473 162.496,124.973 163.296,124.973 164.066,124.203 166.59,124.203 167.233,124.846 ; 167.241,47.114 170.759,47.114 ; 167.241,86.484 170.759,86.484 ; 167.241,125.854 170.759,125.854

## Polygon pours and split planes (outlines as drawn)
GND on Top Layer "Top Layer-No Net" (solid, pour order 18): 15,155 200,155 200,15 15,15 15,155
GND on Bottom Layer "Top Layer-No Net" (solid, pour order 20): 15,155 15,15 200,15 200,155 15,155

## Silkscreen, mask and mechanical layers (free items; w line width, h text height)
Top Overlay:
  lines w0.203: 50.998,29.715 49.347,29.715 26.106,29.715 26.106,65.402 50.998,65.402 ; 50.998,69.085 49.347,69.085 26.106,69.085 26.106,104.772 50.998,104.772 ; 76.398,29.715 74.747,29.715 51.506,29.715 51.506,65.402 76.398,65.402 ; 76.398,69.085 74.747,69.085 51.506,69.085 51.506,104.772 76.398,104.772 ; 101.798,29.715 100.147,29.715 76.906,29.715 76.906,65.402 101.798,65.402 ; 101.798,69.085 100.147,69.085 76.906,69.085 76.906,104.772 101.798,104.772 ; 101.798,108.455 100.147,108.455 76.906,108.455 76.906,144.142 101.798,144.142 ; 127.198,29.715 125.547,29.715 102.306,29.715 102.306,65.402 127.198,65.402 ; 127.198,69.085 125.547,69.085 102.306,69.085 102.306,104.772 127.198,104.772 ; 127.198,108.455 125.547,108.455 102.306,108.455 102.306,144.142 127.198,144.142 ; 152.598,29.715 150.947,29.715 127.706,29.715 127.706,65.402 152.598,65.402 ; 152.598,69.085 150.947,69.085 127.706,69.085 127.706,104.772 152.598,104.772 ; 152.598,108.455 150.947,108.455 127.706,108.455 127.706,144.142 152.598,144.142 ; 177.998,29.715 176.347,29.715 153.106,29.715 153.106,65.402 177.998,65.402 ; 177.998,69.085 176.347,69.085 153.106,69.085 153.106,104.772 177.998,104.772 ; 177.998,108.455 176.347,108.455 153.106,108.455 153.106,144.142 177.998,144.142
  lines w0.254: 14.985,10.16 14.985,10.668 ; 16.509,9.906 14.985,10.414 ; 16.509,10.922 14.985,10.414 ; 101.746,10.414 14.985,10.414 ; 113.223,10.414 199.985,10.414 ; 198.461,9.906 199.985,10.414 ; 198.461,10.922 199.985,10.414 ; 199.985,10.16 199.985,10.668 ; 202.238,16.524 202.746,15 ; 202.238,153.476 202.746,155 ; 202.492,15 203,15 ; 202.492,155 203,155 ; 202.746,79.261 202.746,15 ; 202.746,90.739 202.746,155 ; 203.254,16.524 202.746,15 ; 203.254,153.476 202.746,155 ; 15,15 15,155 200,155 200,15 15,15
  text "Ch14" at 103.124,146.05 h0.76
  text "Ch13" at 76.454,145.796 h0.76
  text "Ch15" at 127.762,145.796 h0.76
  text "Ch16" at 152.908,145.796 h0.76
  text "Ch8" at 26.416,106.172 h0.76
  text "Ch11" at 127.762,106.172 h0.76
  text "Ch12" at 152.908,106.172 h0.76
  text "Ch7" at 52.324,105.918 h0.76
  text "Ch10" at 102.87,105.918 h0.76
  text "Ch9" at 76.962,105.664 h0.76
  text "140 (mm)" at 203.66,79.515 h1.52 r90
  text "Ch5" at 51.308,66.802 h0.76
  text "Ch4" at 76.962,66.802 h0.76
  text "Ch3" at 102.362,66.802 h0.76
  text "Ch6" at 26.416,66.548 h0.76
  text "Ch2" at 127.762,66.548 h0.76
  text "Ch1" at 153.162,66.548 h0.76
  text "185 (mm)" at 102,9.5 h1.52

## Text inside footprints (layer, text, board x,y; h text height)
logicCh: Top Overlay "9" at 187.071,72.517 h0.76 r90; Top Overlay "1" at 189.611,72.517 h0.76 r90; Top Overlay "8" at 189.611,94.869 h0.76 r90; Top Overlay "16" at 187.071,94.869 h0.76 r90
outCh: Top Overlay "9" at 91.948,22.86 h0.76; Top Overlay "1" at 91.948,20.32 h0.76; Top Overlay "8" at 114.3,20.32 h0.76; Top Overlay "16" at 114.3,22.86 h0.76
U3: Top Overlay "*" at 34.78,61.612 h0.76; Mechanical 13 "*" at 35.987,60.64 h0.76
U3_1: Top Overlay "*" at 60.18,61.612 h0.76; Mechanical 13 "*" at 61.387,60.64 h0.76
U3_2: Top Overlay "*" at 85.58,61.612 h0.76; Mechanical 13 "*" at 86.787,60.64 h0.76
U3_3: Top Overlay "*" at 110.98,61.612 h0.76; Mechanical 13 "*" at 112.187,60.64 h0.76
U3_4: Top Overlay "*" at 136.38,61.612 h0.76; Mechanical 13 "*" at 137.587,60.64 h0.76
U3_5: Top Overlay "*" at 161.78,61.612 h0.76; Mechanical 13 "*" at 162.987,60.64 h0.76
U3_6: Top Overlay "*" at 34.78,100.982 h0.76; Mechanical 13 "*" at 35.987,100.01 h0.76
U3_7: Top Overlay "*" at 60.18,100.982 h0.76; Mechanical 13 "*" at 61.387,100.01 h0.76
U3_8: Top Overlay "*" at 85.58,100.982 h0.76; Mechanical 13 "*" at 86.787,100.01 h0.76
U3_9: Top Overlay "*" at 110.98,100.982 h0.76; Mechanical 13 "*" at 112.187,100.01 h0.76
U3_10: Top Overlay "*" at 136.38,100.982 h0.76; Mechanical 13 "*" at 137.587,100.01 h0.76
U3_11: Top Overlay "*" at 161.78,100.982 h0.76; Mechanical 13 "*" at 162.987,100.01 h0.76
U3_12: Top Overlay "*" at 85.58,140.352 h0.76; Mechanical 13 "*" at 86.787,139.38 h0.76
U3_13: Top Overlay "*" at 110.98,140.352 h0.76; Mechanical 13 "*" at 112.187,139.38 h0.76
U3_14: Top Overlay "*" at 136.38,140.352 h0.76; Mechanical 13 "*" at 137.587,139.38 h0.76
U3_15: Top Overlay "*" at 161.78,140.352 h0.76; Mechanical 13 "*" at 162.987,139.38 h0.76